# Altium PCB A1.0-电源-1.0-简易电源220V转12V.PcbDoc
Units mm, origin at the board's own origin, x right, y up, seen from the top; angles counter-clockwise.
Board outline 283 x 47 mm, 2 copper layers (Top Layer, Bottom Layer); 19 components, 13 nets, 53 pads, 2 vias.
Unrouted connection lines stored in the file: 1.
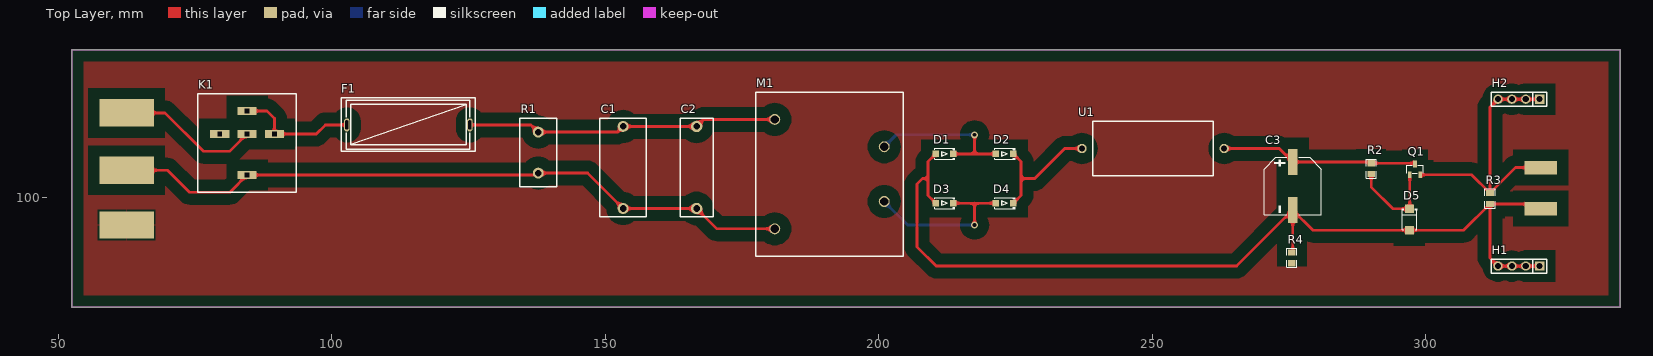
[diagram p0: Top Layer view]
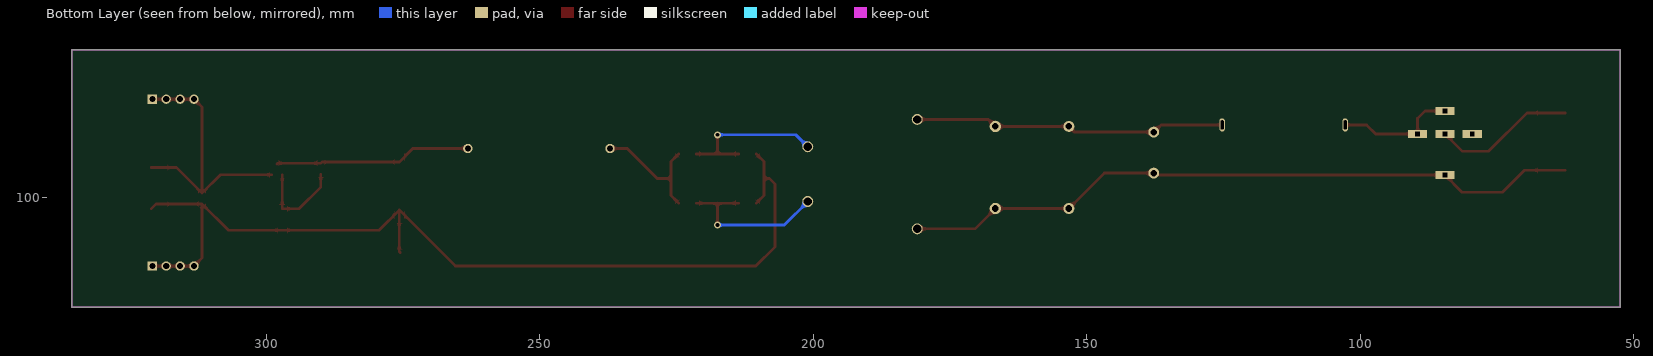
[diagram p1: Bottom Layer view, seen from below]

## Layer stack, top to bottom
Top Solder: solder mask 0.0102, Solder Resist, Dk 3.5
Top Layer: signal copper 0.0356
Dielectric 1: dielectric 0.32, FR-4, Dk 4.8
Bottom Layer: signal copper 0.0356
Bottom Solder: solder mask 0.0102, Solder Resist, Dk 3.5

## Board outline
52.5,80 52.5,127 335.5,127 335.5,80

## Design rules (kind name [scope] priority, off if disabled: settings)
Clearance Clearance_1 [InNamedPolygon('Top Layer-GND')] p1: gap=2
Clearance [All] p2: gap=0.254
PolygonConnect [All] p1: connectstyle=Relief reliefconductorwidth=0.254 reliefentries=4 polygonreliefangle="90 Angle" airgapwidth=0.254
RoutingVias [All] p1: holewidth=0.711 width=1.27 viastyle="Through Hole" minholewidth=0.711 minwidth=1.27 maxholewidth=0.711 maxwidth=1.27
SolderMaskExpansion [All] p1: expansion=0.102
Width [All] p1: maxlimit=1.5 minlimit=0.254 preferedwidth=0.5
30 further rules are at their usual default settings.

## Components (designator, comment, footprint, x,y, rotation, side; value= is the part's Value field where it differs from the comment)
C1 "470nF" CAP-TH_L18.0-W8.5-P15.00-D0.8 153.254,105.523 r90 top
C2 "100nF" CAP-TH_L18.0-W6.0-P15.00-D0.8 166.69,105.523 r90 top
C3 "470uF" CAP-SMD_BD10.0-L10.3-W10.3-LS11.0-R-RD 275.665,102.132 r90 top
D1 "1N4007 A7" SOD-123FL_L2.8-W1.8-LS3.7-RD 212,108 r180 top
D2 "1N4007 A7" SOD-123FL_L2.8-W1.8-LS3.7-RD 223,108 r180 top
D3 "1N4007 A7" SOD-123FL_L2.8-W1.8-LS3.7-RD 212,99 r180 top
D4 "1N4007 A7" SOD-123FL_L2.8-W1.8-LS3.7-RD 223,99 r180 top
D5 "1SMAF4742A-MS" SMAF_L3.5-W2.6-LS4.7-RD 297,96 r270 top
F1 "保险丝透明座" FUSE-TH_L24.5-W9.8-P22.5 113.985,113.308 r0 top
H1 "PZ254V-11-04P" HDR-TH_4P-P2.54-V-M 317,87.5 r180 top
H2 "PZ254V-11-04P" HDR-TH_4P-P2.54-V-M 317,118 r180 top
K1 "方形/白灯/自锁/220V" 方形/白灯/自锁/220V 75.5,101 r0 top
M1 "220V-12V" 220v-12v 177.485,89.305 r0 top
Q1 "SS8050" SOT-23-3_L2.9-W1.3-P1.90-LS2.4-BR 298.017,105.18 r270 top
R1 "10D471K" RES-TH_L12.5-W6.7-P7.50-D1.2 137.734,108.248 r90 top
R2 "100Ω" R0805 290.016,105.307 r90 top
R3 "10kΩ" R0805 311.733,99.846 r270 top
R4 "10kΩ" R0805 275.5,89 r90 top
U1 "10Ω" RES-TH_L22.0-W10.0-P26.00-D1.0 250.138,108.99 r0 top

## Footprints (in the part's own frame and the unit in brackets; to place one, negate y for a bottom-side part, rotate by r counter-clockwise, add the part's x,y. Pads: shape width x height; smd on the part's side, far side on the other; paste and mask are expansions set on the pad)
220v-12v [mm]
  round 2 hole 1.5: 1(3.5,25) 2(3.5,5) 3(23.5,20) 4(23.5,10)
  silkscreen extent 0,0 27,30
CAP-SMD_BD10.0-L10.3-W10.3-LS11.0-R-RD [mm]
  rect 4.8x1.8 smd: 1(4.395,0) 2(-4.395,0)
  silkscreen extent -5.23,-5.23 5.23,5.23
CAP-TH_L18.0-W6.0-P15.00-D0.8 [mm]
  round 2.1 hole 1.2: 1(-7.5,0) 2(7.5,0)
  silkscreen extent -9,-3 9,3
CAP-TH_L18.0-W8.5-P15.00-D0.8 [mm]
  round 2 hole 1.2: 1(-7.5,0) 2(7.5,0)
  silkscreen extent -9,-4.27 9,4.23
FUSE-TH_L24.5-W9.8-P22.5 [mm]
  oval 1x2.4 hole 0.6 slot 1.68 at 90 deg: 1(-11.25,0) 2(11.25,0)
  silkscreen extent -12.3,-4.8 12.2,5
HDR-TH_4P-P2.54-V-M [mm]
  rect 1.7x1.7 hole 1.1: 1(-3.81,0)
  round 1.7 hole 1.1: 2(-1.27,0) 3(1.27,0) 4(3.81,0)
  silkscreen extent -5.08,-1.27 5.08,1.27
R0805 [mm]
  rect 1.133x1.377 smd paste-100 mask+0.051: 1(-1,0) 2(1,0)
  silkscreen extent -1.76,-0.92 1.76,0.92
RES-TH_L12.5-W6.7-P7.50-D1.2 [mm]
  round 2 hole 1.2: 1(-3.749,0) 2(3.749,0)
  silkscreen extent -6.25,-3.35 6.25,3.35
RES-TH_L22.0-W10.0-P26.00-D1.0 [mm]
  round 1.7 hole 1.1 paste-2539.97 mask+0.05: 1(-13,0) 2(13,0)
  silkscreen extent -11,-5 11,5
SMAF_L3.5-W2.6-LS4.7-RD [mm]
  rect 1.6x1.7 smd: 1(-1.96,0) 2(1.96,0)
  silkscreen extent -2.01,-1.43 1.83,1.42
SOD-123FL_L2.8-W1.8-LS3.7-RD [mm]
  rect 1.2x1.2 smd: 1(-1.6,0) 2(1.6,0)
  silkscreen extent -1.9,-1 1.8,1
SOT-23-3_L2.9-W1.3-P1.90-LS2.4-BR [mm]
  rect 1.25x0.7 smd: 1(1,-0.95) 2(1,0.95) 3(-1,0)
  silkscreen extent -0.73,-1.53 0.73,1.53
方形/白灯/自锁/220V [mm]
  rect 3.5x1.5 hole 0.8 square: C(14,10.65) LED_L(9,14.85) LED_N(9,3.15) NC(4,10.65) NO(9,10.65)
  silkscreen extent 0,0 18,18

## Part data
C1: library part MPX474K31D4KN15800
C2: library part MPX104K31D2KN15800
C3: library part RVT1V471M1010_C72519
M1: library part 220v转12v电源变压器
Q1: library part SS8050_C2150
R1: library part 10D471K_C8760
R2: library part 0805W8F1000T5E
R3 R4: library part 0805W8J0103T5E
U1: library part SQP5W-10Ω±5%-9P

## Free pads (board coordinates)
  rect 10x5 smd: 1(62.5,115.5) 2(62.5,105) 3(62.5,95)
  rect 6x2.5 smd: 1(321,105.5) 2(321,98)

## Via types
v1: diameter 1.27, hole 0.711, Top Layer to Bottom Layer, 2 vias

## Nets (pads, with @x,y where several pads share a name; then routed paths per layer and width w, separated by ;. In a path a pad name is that pad's centre, name@x,y a point inside that pad or via, vN(x,y) a via of type N, cw(c..) or ccw(c..) an arc to the next point about the centre after c; other vN are vias at no path point)
12+: C3.1 Q1.3 R2.2 U1.2 | length 36
  Top Layer w0.5: U1.2 273.202,108.99 C3.1 289.796,106.527 R2.2 297.89,106.307 Q1.3
12+_OUT: H2.1 H2.2 H2.3 H2.4 pad.1@321,105.5 Q1.2 R3.1 | length 50.7
  Top Layer w0.5: Q1.2 308.399,104.18 R3.1 ; H2.1 H2.2 H2.3 H2.4 311.733,116.543 R3.1 ; pad.1@321,105.5 316.387,105.5 R3.1
12-: C3.2 D1.2 D3.2 D5.2 H1.1 H1.2 H1.3 H1.4 pad.2@321,98 R3.2 R4.2 | length 175
  Top Layer w0.5: D3.2 209,100.4 209,103.5 ; D1.2 209,106.6 209,103.5 ; R4.2 275.665,90.165 C3.2 ; H1.1 H1.4 311.733,88.957 R3.2 ; pad.2@321,98 320.154,98.846 R3.2 ; 209,103.5 208,103.5 207,102.5 207,91 210.5,87.5 265.428,87.5 C3.2 ; C3.2 279.362,94.04 D5.2 306.927,94.04 R3.2
12-OUT: 
12L: D1.1 D2.2 M1.3 | length 28.7
  Top Layer w0.5: D1.1 217.5,108 ; v1(217.5,111.5) 217.5,108 ; D2.2 217.5,108
  Bottom Layer w0.5: M1.3 203.18,111.5 v1(217.5,111.5)
12L+: D2.1 D4.1 U1.1 | length 23.6
  Top Layer w0.5: D4.1 226,100.4 226,103.5 ; D2.1 226,106.6 226,103.5 ; U1.1 233.99,108.99 228.5,103.5 226,103.5
12N: D3.1 D4.2 M1.4 | length 30.1
  Top Layer w0.5: D3.1 217.5,99 ; v1(217.5,95) 217.5,99 ; D4.2 217.5,99
  Bottom Layer w0.5: M1.4 205.29,95 v1(217.5,95)
GND: pad.3 R4.1
L_IN: K1.NO pad.1@62.5,115.5 | length 26.2
  Top Layer w0.5: pad.1@62.5,115.5 69.5,115.5 76.5,108.5 81.35,108.5 K1.NO
L_OUT: C1.2 C2.2 F1.2 M1.1 R1.2 | length 57.2
  Top Layer w0.5: F1.2 136.423,113.308 R1.2 152.228,111.997 C1.2 C2.2 167.971,114.305 M1.1
N_IN: C1.1 C2.1 K1.LED_N M1.2 pad.2@62.5,105 R1.1 | length 125.8
  Top Layer w0.5: pad.2@62.5,105 70,105 74,101 81.35,101 K1.LED_N 137.385,104.15 R1.1 146.779,104.499 C1.1 C2.1 170.408,94.305 M1.2
NetD5_1: D5.1 Q1.1 R2.1 | length 17.2
  Top Layer w0.5: R2.1 290.016,101.984 294.04,97.96 D5.1 297.067,98.027 Q1.1
NetF1_1: F1.1 K1.C K1.LED_L | length 22.3
  Top Layer w0.5: K1.LED_L 88.15,115.85 89.5,114.5 K1.C 97.15,111.65 98.808,113.308 F1.1
pads on no net: K1.NC

## Polygon pours and split planes (outlines as drawn)
GND on Top Layer "Top Layer-GND" (solid, remove dead copper, pour order 0): 52.5,127 52.5,80 335.5,80 335.5,127 52.5,127

## Keep-outs
Keep-Out Layer:
  the board outline again, w0.254